# EAGLE board medium_h220x4 (EAGLE 5.06)
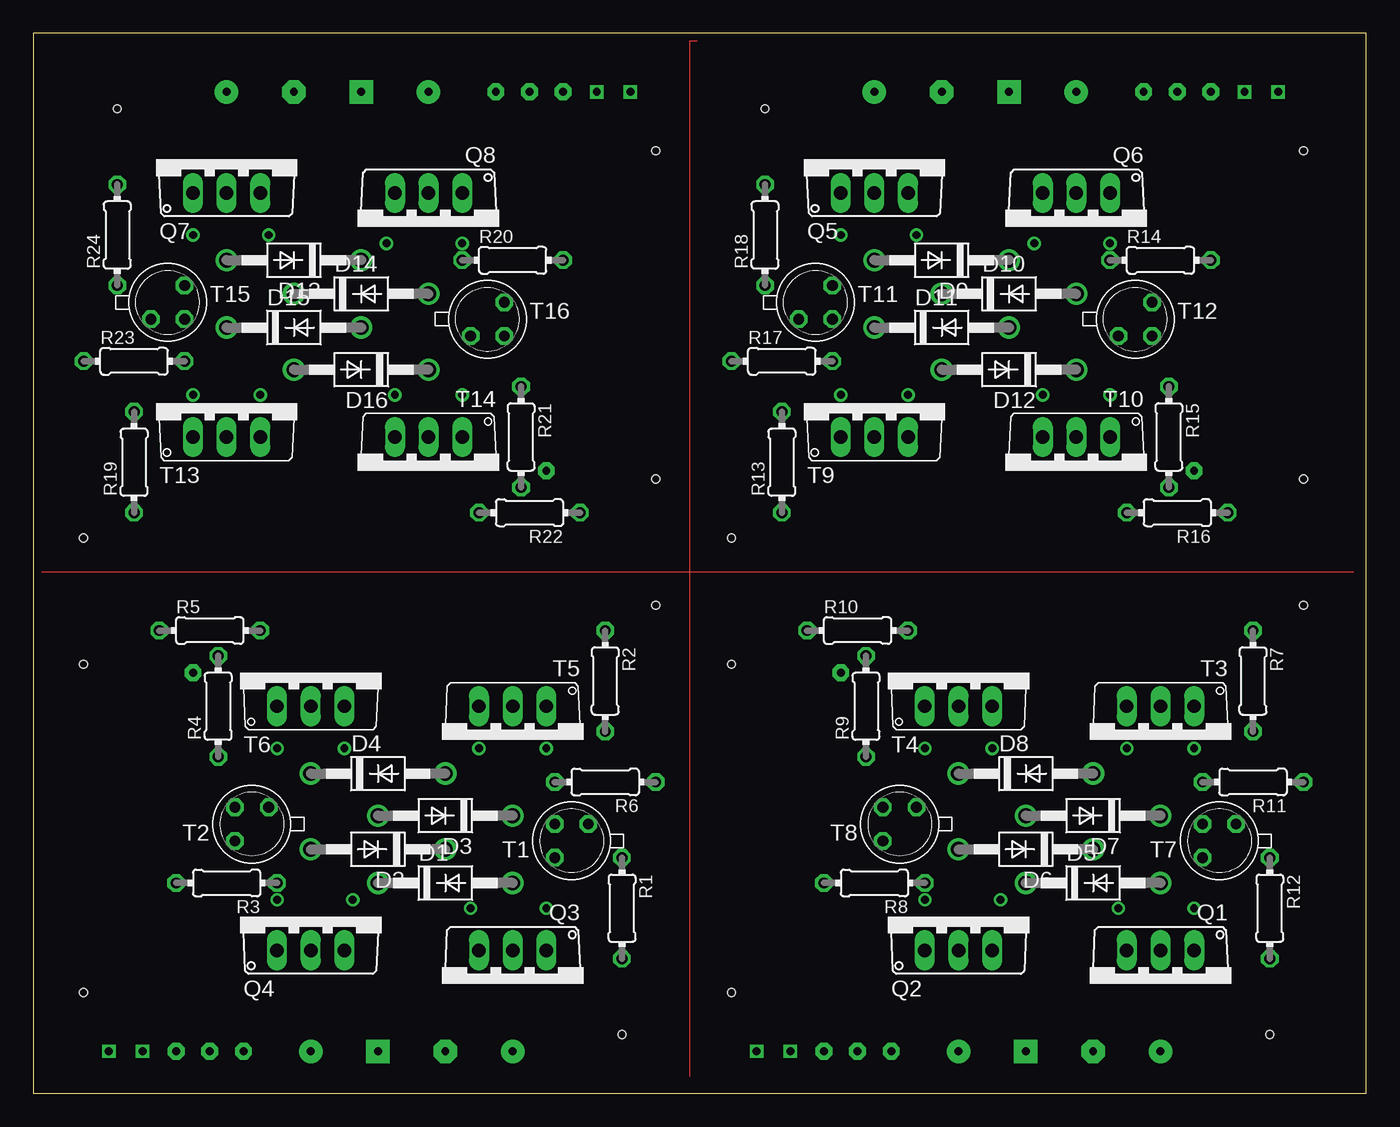
[diagram p0: board, top side]
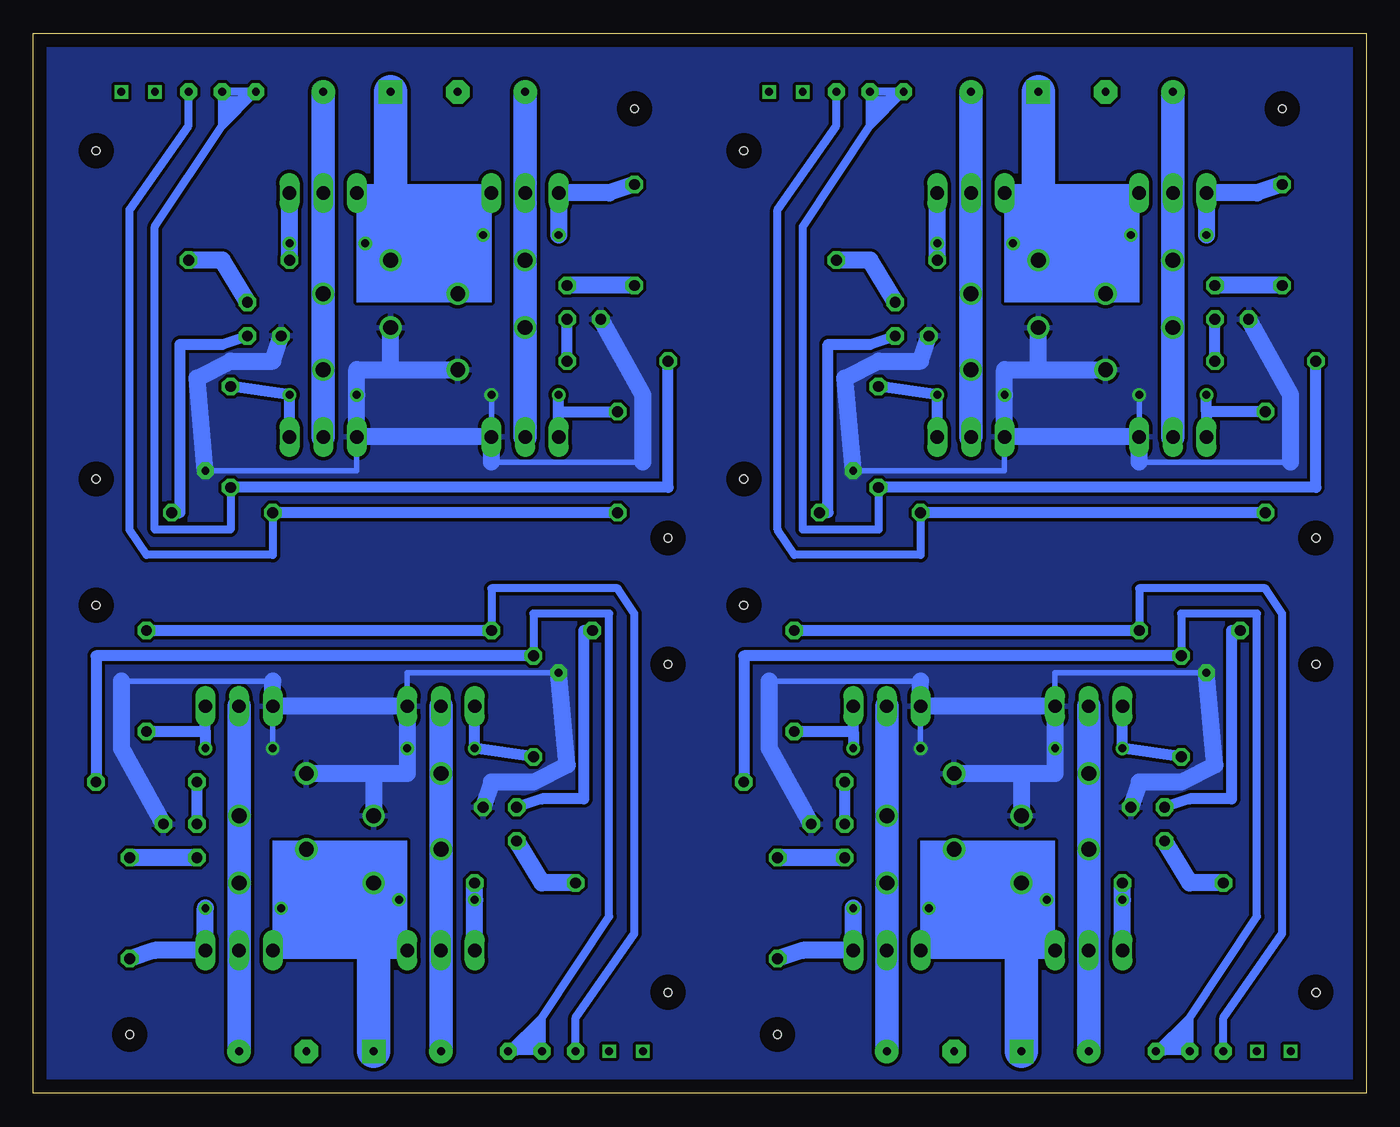
[diagram p1: board, bottom side, seen from below]

Size 100.64 x 80 mm. Coordinates in mm from the lower left corner, seen from the top.
Outline: 0,0 100.64,0 100.64,80 0,80 0,0
Copper layers (1*16): Top 0.035mm / dielectric 1.5mm / Bottom 0.035mm
Design rules "default *": minimum track width 10mil, minimum drill 24mil, track to track 10mil, track to pad 8mil, pad to pad 8mil, via to via 8mil, smd to smd 8mil, copper to edge 40mil, drill to drill 8mil, minimum pad ring 10mil, minimum via ring 8mil, stop-mask expansion 6mil, vias tented up to drill 0mil, thermal gap 10mil
Holes 0.6 mm at 3.81,7.62 44.45,4.45 3.81,32.38 46.99,36.83 52.7,7.62 93.34,4.45 52.7,32.38 95.89,36.83 95.89,71.12 55.24,74.3 95.89,46.35 52.7,41.91 46.99,71.12 6.35,74.3 46.99,46.35 3.81,41.91

## Footprints (pad centres in the part's own frame; a part is rotated, then mirrored left to right if it is on the bottom)
DO41-10 = drill 1.118 round: A 5.08,0; C -5.08,0
TO220AV = drill 1.016 long: B -2.54,-2.54; C 0,-2.54; E 2.54,-2.54
0204/7 = drill 0.813 octagon: 1 -3.81,0; 2 3.81,0
TO18 = drill 0.813 octagon: 1 -1.27,-1.27; 2 1.27,-1.27; 3 1.27,1.27
TO220V = drill 1.016 long: 1 -2.54,-2.54; 2 0,-2.54; 3 2.54,-2.54

## Placement (x,y rotation side)
D1  1N4004  [DO41-10]  31.12,15.88 0 top
D2  1N4004  [DO41-10]  26.04,18.41 180 top
D3  1N4004  [DO41-10]  31.12,20.95 180 top
D4  1N4004  [DO41-10]  26.04,24.13 0 top
D5  1N4004  [DO41-10]  80.01,15.88 0 top
D6  1N4004  [DO41-10]  74.93,18.41 180 top
D7  1N4004  [DO41-10]  80.01,20.95 180 top
D8  1N4004  [DO41-10]  74.93,24.13 0 top
D9  1N4004  [DO41-10]  68.58,62.87 180 top
D10  1N4004  [DO41-10]  73.66,60.33 0 top
D11  1N4004  [DO41-10]  68.58,57.78 0 top
D12  1N4004  [DO41-10]  73.66,54.61 180 top
D13  1N4004  [DO41-10]  19.69,62.87 180 top
D14  1N4004  [DO41-10]  24.77,60.33 0 top
D15  1N4004  [DO41-10]  19.69,57.78 0 top
D16  1N4004  [DO41-10]  24.77,54.61 180 top
Q1  MJE2955  [TO220AV]  85.09,8.26 180 top
Q2  MJE2955  [TO220AV]  69.85,13.34 0 top
Q3  MJE2955  [TO220AV]  36.2,8.26 180 top
Q4  MJE2955  [TO220AV]  20.96,13.34 0 top
Q5  MJE2955  [TO220AV]  63.5,70.48 0 top
Q6  MJE2955  [TO220AV]  78.74,65.41 180 top
Q7  MJE2955  [TO220AV]  14.61,70.48 0 top
Q8  MJE2955  [TO220AV]  29.85,65.41 180 top
R1  [0204/7]  44.45,13.97 270 top
R2  [0204/7]  43.18,31.11 270 top
R3  [0204/7]  14.61,15.88 180 top
R4  [0204/7]  13.97,29.21 90 top
R5  [0204/7]  13.33,34.92 0 top
R6  [0204/7]  43.18,23.5 180 top
R7  [0204/7]  92.08,31.11 270 top
R8  [0204/7]  63.5,15.88 180 top
R9  [0204/7]  62.86,29.21 90 top
R10  [0204/7]  62.23,34.92 0 top
R11  [0204/7]  92.08,23.5 180 top
R12  [0204/7]  93.34,13.97 270 top
R13  [0204/7]  56.52,47.62 90 top
R14  [0204/7]  85.09,62.87 0 top
R15  [0204/7]  85.73,49.53 270 top
R16  [0204/7]  86.36,43.81 180 top
R17  [0204/7]  56.52,55.24 0 top
R18  [0204/7]  55.24,64.77 90 top
R19  [0204/7]  7.62,47.62 90 top
R20  [0204/7]  36.2,62.87 0 top
R21  [0204/7]  36.83,49.53 270 top
R22  [0204/7]  37.46,43.81 180 top
R23  [0204/7]  7.62,55.24 0 top
R24  [0204/7]  6.35,64.77 90 top
T1  2N2222  [TO18]  40.64,19.05 180 top
T2  2N2222  [TO18]  16.51,20.32 180 top
T3  [TO220V]  85.09,26.67 180 top
T4  [TO220V]  69.85,31.75 0 top
T5  [TO220V]  36.2,26.67 180 top
T6  [TO220V]  20.96,31.75 0 top
T7  2N2222  [TO18]  89.54,19.05 180 top
T8  2N2222  [TO18]  65.41,20.32 180 top
T9  [TO220V]  63.5,52.07 0 top
T10  [TO220V]  78.74,46.99 180 top
T11  2N2222  [TO18]  59.05,59.69 0 top
T12  2N2222  [TO18]  83.19,58.42 0 top
T13  [TO220V]  14.61,52.07 0 top
T14  [TO220V]  29.85,46.99 180 top
T15  2N2222  [TO18]  10.16,59.69 0 top
T16  2N2222  [TO18]  34.29,58.42 0 top

## Library data of the parts
D1-D16 = diode
Q1-Q8 = transistor-power
R1-R24 = resistor
T1 T2 T7 T8 T11 T12 T15 T16 = transistor
T3-T6 T9 T10 T13 T14 = transistor-neu-to92

## Nets
+12V: D1.C D2.C Q3.E Q4.E
+12V1: D5.C D6.C Q1.E Q2.E
+12V2: D9.C D10.C Q5.E Q6.E
+12V3: D13.C D14.C Q7.E Q8.E
GND: D3.A D4.A D7.A D8.A D11.A D12.A D15.A D16.A T1.1 T2.1 T3.3 T4.3 T5.3 T6.3 T7.1 T8.1 T9.3 T10.3 T11.1 T12.1 T13.3 T14.3 T15.1 T16.1
N$1: R1.1 T1.3
N$2: Q3.B R1.2
N$3: D2.A D4.C Q4.C T6.2
N$4: R4.2 R6.1
N$7: R4.1 T6.1
N$8: Q4.B R3.1
N$9: R2.2 T5.1
N$10: R6.2 T1.2
N$11: R5.1 T2.2
N$12: R3.2 T2.3
N$13: D1.A D3.C Q3.C T5.2
N$15: R2.1 R5.2
N$17: R12.1 T7.3
N$22: Q1.B R12.2
N$23: R9.1 T4.1
N$24: Q2.B R8.1
N$25: R7.2 T3.1
N$26: R11.2 T7.2
N$27: R10.1 T8.2
N$28: R8.2 T8.3
N$29: R7.1 R10.2
N$30: D6.A D8.C Q2.C T4.2
N$31: D5.A D7.C Q1.C T3.2
N$33: R9.2 R11.1
N$41: R18.1 T11.3
N$42: Q5.B R18.2
N$43: R15.1 T10.1
N$44: Q6.B R14.1
N$45: R13.2 T9.1
N$46: R17.2 T11.2
N$47: R16.1 T12.2
N$48: R14.2 T12.3
N$49: R13.1 R16.2
N$50: D10.A D12.C Q6.C T10.2
N$51: D9.A D11.C Q5.C T9.2
N$53: R15.2 R17.1
N$61: R24.1 T15.3
N$62: Q7.B R24.2
N$63: R21.1 T14.1
N$64: Q8.B R20.1
N$65: R19.2 T13.1
N$66: R23.2 T15.2
N$67: R22.1 T16.2
N$68: R20.2 T16.3
N$69: R19.1 R22.2
N$70: D14.A D16.C Q8.C T14.2
N$71: D13.A D15.C Q7.C T13.2
N$73: R21.2 R23.1

## Tracks (layer width: path | path; a pad name or v marks a point on that pad's centre or on a via)
+12V  (via drill 0.6 pad 1.78)
  Bottom 1.27: 27.31,10.79 Q3.E | Q4.E 26.04,10.79 27.31,10.79 | 27.31,10.79 D1.C D2.C
  Bottom 2.54: v26.04,3.17 26.04,10.79
+12V1  (via drill 0.6 pad 1.78)
  Bottom 1.27: 76.2,10.79 Q1.E | Q2.E 74.93,10.79 76.2,10.79 | 76.2,10.79 D5.C D6.C
  Bottom 2.54: v74.93,3.17 74.93,10.79
+12V2  (via drill 0.6 pad 1.78)
  Bottom 1.27: 72.39,67.94 Q5.E | Q6.E 73.66,67.94 72.39,67.94 | 72.39,67.94 D9.C D10.C
  Bottom 2.54: 73.66,67.94 v73.66,75.56
+12V3  (via drill 0.6 pad 1.78)
  Bottom 1.27: 23.5,67.94 Q7.E | Q8.E 24.77,67.94 23.5,67.94 | 23.5,67.94 D13.C D14.C
  Bottom 2.54: 24.77,67.94 v24.77,75.56
GND  (via drill 0.6, 0.6 pad 1.27)
  Bottom 0.406: 33.66,31.11 45.09,31.11 | v12.06,31.75 23.5,31.75 T6.3 | T5.3 v33.66,26.04 | 82.55,31.11 93.98,31.11 | v60.96,31.75 72.39,31.75 T4.3 | T3.3 v82.55,26.04 | 54.61,47.62 66.04,47.62 | v87.63,46.99 76.2,46.99 T10.3 | T9.3 v66.04,52.7 | 5.71,47.62 17.15,47.62 | v38.73,46.99 27.31,46.99 T14.3 | T13.3 v17.15,52.7
  Bottom 1.27: 45.09,31.11 45.09,26.04 T1.1 | T2.1 17.15,23.5 13.97,23.5 11.43,24.77 v12.06,31.75 | 33.66,31.11 T5.3 T6.3 v23.5,26.04 23.5,24.13 26.04,24.13 | 26.04,24.13 D4.A | 26.04,24.13 D3.A | 93.98,31.11 93.98,26.04 T7.1 | T8.1 66.04,23.5 62.86,23.5 60.32,24.77 v60.96,31.75 | 82.55,31.11 T3.3 T4.3 v72.39,26.04 72.39,24.13 74.93,24.13 | 74.93,24.13 D8.A | 74.93,24.13 D7.A | 54.61,47.62 54.61,52.7 T11.1 | T12.1 82.55,55.24 85.73,55.24 88.27,53.98 v87.63,46.99 | 66.04,47.62 T9.3 T10.3 v76.2,52.7 76.2,54.61 73.66,54.61 | 73.66,54.61 D12.A | 73.66,54.61 D11.A | 5.71,47.62 5.71,52.7 T15.1 | T16.1 33.66,55.24 36.83,55.24 39.37,53.98 v38.73,46.99 | 17.15,47.62 T13.3 T14.3 v27.31,52.7 27.31,54.61 24.77,54.61 | 24.77,54.61 D16.A | 24.77,54.61 D15.A
  pour Bottom: 0,80.01 100.33,80.01 100.33,0 0,0
N$1
  Bottom 1.27: T1.3 R1.1
N$2
  Bottom 1.27: 38.73,13.97 Q3.B 42.54,10.79 R1.2
N$3  (via drill 0.6 pad 1.78)
  Bottom 1.778: D2.A Q4.C v20.96,3.17 | D2.A T6.2 | D2.A D4.C
N$4  (via drill 0.6 pad 1.27)
  Bottom 0.61: 13.33,5.71 v15.88,3.17 15.24,3.17 | 13.33,5.71 8.26,13.34 8.26,36.2 13.97,36.2 R4.2 | 15.24,3.17 v13.33,3.17 13.33,3.81 | 13.33,3.81 13.33,5.08 | 13.33,5.08 13.97,4.45 | 13.97,4.45 14.61,3.81 | 15.24,3.17 14.61,3.81 | 14.61,3.81 13.97,3.81 13.97,4.45 | 13.33,3.81 13.97,4.45 | 13.33,5.08 13.33,5.71
  Bottom 0.813: R6.1 46.99,33.02 R4.2
  other vias: 13.97,33.02
N$5  (via drill 0.6)
  other vias: 8.26,3.17
N$6  (via drill 0.6)
  other vias: 5.71,3.17
N$7
  Bottom 0.813: R4.1 18.42,26.04 T6.1
N$8  (via drill 0.6)
  Bottom 1.27: Q4.B v18.42,14.61 R3.1
N$9
  Bottom 0.813: 38.73,27.3 T5.1 | 38.73,27.3 38.73,26.04 | 38.73,27.3 R2.2
N$10
  Bottom 0.813: T1.2 R6.2
N$11
  Bottom 0.813: T2.2 13.33,22.23 10.16,22.23 10.16,34.92 R5.1
N$12
  Bottom 1.27: T2.3 13.33,15.88 R3.2
N$13  (via drill 0.6 pad 1.78)
  Bottom 1.778: T5.2 D3.C D1.A Q3.C v36.2,3.17
N$14  (via drill 0.6)
  other vias: 18.42,26.04
N$15  (via drill 0.6 pad 1.27)
  Bottom 0.61: R5.2 17.15,38.1 7.62,38.1 6.35,36.2 6.35,12.06 10.79,5.71 v10.79,3.17
  Bottom 0.813: R5.2 R2.1
  other vias: 17.15,34.92
N$16  (via drill 0.6 pad 1.78)
  other vias: 31.12,3.17
N$17
  Bottom 1.27: T7.3 R12.1
N$18  (via drill 0.6)
  other vias: 38.73,26.04
N$19  (via drill 0.6)
  other vias: 24.13,14.61
N$20  (via drill 0.6)
  other vias: 33.02,13.97
N$21  (via drill 0.6)
  other vias: 38.73,13.97
N$22
  Bottom 1.27: 87.63,13.97 Q1.B 91.44,10.79 R12.2
N$23
  Bottom 0.813: R9.1 67.31,26.04 T4.1
N$24  (via drill 0.6)
  Bottom 1.27: Q2.B v67.31,14.61 R8.1
N$25
  Bottom 0.813: 87.63,27.3 T3.1 | 87.63,27.3 87.63,26.04 | 87.63,27.3 R7.2
N$26
  Bottom 0.813: T7.2 R11.2
N$27
  Bottom 0.813: T8.2 62.23,22.23 59.05,22.23 59.05,34.92 R10.1
N$28
  Bottom 1.27: T8.3 62.23,15.88 R8.2
N$29  (via drill 0.6 pad 1.27)
  Bottom 0.61: R10.2 66.04,38.1 56.52,38.1 55.24,36.2 55.24,12.06 59.69,5.71 v59.69,3.17
  Bottom 0.813: R10.2 R7.1
  other vias: 66.04,34.92
N$30  (via drill 0.6 pad 1.78)
  Bottom 1.778: D6.A Q2.C v69.85,3.17 | D6.A T4.2 | D6.A D8.C
N$31  (via drill 0.6 pad 1.78)
  Bottom 1.778: T3.2 D7.C D5.A Q1.C v85.09,3.17
N$32  (via drill 0.6 pad 1.78)
  other vias: 80.01,3.17
N$33  (via drill 0.6 pad 1.27)
  Bottom 0.61: 62.23,5.71 v64.77,3.17 64.14,3.17 | 62.23,5.71 57.15,13.34 57.15,36.2 62.86,36.2 R9.2 | 64.14,3.17 v62.23,3.17 62.23,3.81 | 62.23,3.81 62.23,5.08 | 62.23,5.08 62.86,4.45 | 62.86,4.45 63.5,3.81 | 64.14,3.17 63.5,3.81 | 63.5,3.81 62.86,3.81 62.86,4.45 | 62.23,3.81 62.86,4.45 | 62.23,5.08 62.23,5.71
  Bottom 0.813: R11.1 95.89,33.02 R9.2
  other vias: 62.86,33.02
N$34  (via drill 0.6)
  other vias: 57.15,3.17
N$35  (via drill 0.6)
  other vias: 54.61,3.17
N$36  (via drill 0.6)
  other vias: 67.31,26.04
N$37  (via drill 0.6)
  other vias: 87.63,26.04
N$38  (via drill 0.6)
  other vias: 73.03,14.61
N$39  (via drill 0.6)
  other vias: 81.92,13.97
N$40  (via drill 0.6)
  other vias: 87.63,13.97
N$41
  Bottom 1.27: R18.1 T11.3
N$42
  Bottom 1.27: 60.96,64.77 Q5.B 57.15,67.94 R18.2
N$43
  Bottom 0.813: R15.1 81.28,52.7 T10.1
N$44  (via drill 0.6)
  Bottom 1.27: Q6.B v81.28,64.14 R14.1
N$45
  Bottom 0.813: T9.1 60.96,51.44 | 60.96,51.44 60.96,52.7 | 60.96,51.44 R13.2
N$46
  Bottom 0.813: R17.2 T11.2
N$47
  Bottom 0.813: T12.2 86.36,56.52 89.54,56.52 89.54,43.81 R16.1
N$48
  Bottom 1.27: T12.3 86.36,62.87 R14.2
N$49  (via drill 0.6 pad 1.27)
  Bottom 0.61: v82.55,43.81 82.55,40.64 92.08,40.64 93.34,42.55 93.34,66.67 88.9,73.03 v88.9,75.56
  Bottom 0.813: R13.1 v82.55,43.81
N$50  (via drill 0.6 pad 1.78)
  Bottom 1.778: D10.A Q6.C v78.74,75.56 | T10.2 D10.A | D10.A D12.C
N$51  (via drill 0.6 pad 1.78)
  Bottom 1.778: T9.2 D11.C D9.A Q5.C v63.5,75.56
N$52  (via drill 0.6 pad 1.78)
  other vias: 68.58,75.56
N$53  (via drill 0.6 pad 1.27)
  Bottom 0.61: 86.36,73.03 v83.82,75.56 84.45,75.56 | 86.36,73.03 91.44,65.41 91.44,42.55 85.73,42.55 R15.2 | 84.45,75.56 v86.36,75.56 86.36,74.93 | 86.36,73.66 86.36,74.93 | 86.36,73.66 85.73,74.3 | 85.73,74.3 85.09,74.93 | 84.45,75.56 85.09,74.93 | 85.09,74.93 85.73,74.93 85.73,74.3 | 86.36,74.93 85.73,74.3 | 86.36,73.03 86.36,73.66
  Bottom 0.813: R17.1 52.7,45.72 R15.2
  other vias: 85.73,45.72
N$54  (via drill 0.6)
  other vias: 91.44,75.56
N$55  (via drill 0.6)
  other vias: 93.98,75.56
N$56  (via drill 0.6)
  other vias: 81.28,52.7
N$57  (via drill 0.6)
  other vias: 60.96,52.7
N$58  (via drill 0.6)
  other vias: 75.57,64.14
N$59  (via drill 0.6)
  other vias: 66.68,64.77
N$60  (via drill 0.6)
  other vias: 60.96,64.77
N$61
  Bottom 1.27: R24.1 T15.3
N$62
  Bottom 1.27: 12.06,64.77 Q7.B 8.26,67.94 R24.2
N$63
  Bottom 0.813: R21.1 32.38,52.7 T14.1
N$64  (via drill 0.6)
  Bottom 1.27: Q8.B v32.38,64.14 R20.1
N$65
  Bottom 0.813: 12.06,51.44 T13.1 | 12.06,51.44 12.06,52.7 | R19.2 12.06,51.44
N$66
  Bottom 0.813: R23.2 T15.2
N$67
  Bottom 0.813: T16.2 37.46,56.52 40.64,56.52 40.64,43.81 R22.1
N$68
  Bottom 1.27: T16.3 37.46,62.87 R20.2
N$69  (via drill 0.6 pad 1.27)
  Bottom 0.61: R22.2 33.66,40.64 43.18,40.64 44.45,42.55 44.45,66.67 40,73.03 v40,75.56
  Bottom 0.813: R19.1 R22.2
  other vias: 33.66,43.81
N$70  (via drill 0.6 pad 1.78)
  Bottom 1.778: D14.A Q8.C v29.85,75.56 | T14.2 D14.A | D14.A D16.C
N$71  (via drill 0.6 pad 1.78)
  Bottom 1.778: T13.2 D15.C D13.A Q7.C v14.61,75.56
N$72  (via drill 0.6 pad 1.78)
  other vias: 19.69,75.56
N$73  (via drill 0.6 pad 1.27)
  Bottom 0.61: 37.46,73.03 v34.92,75.56 35.56,75.56 | 37.46,73.03 42.54,65.41 42.54,42.55 36.83,42.55 R21.2 | 35.56,75.56 v37.46,75.56 37.46,74.93 | 37.46,73.66 37.46,74.93 | 37.46,73.66 36.83,74.3 | 36.83,74.3 36.2,74.93 | 35.56,75.56 36.2,74.93 | 36.2,74.93 36.83,74.93 36.83,74.3 | 37.46,74.93 36.83,74.3 | 37.46,73.03 37.46,73.66
  Bottom 0.813: R23.1 3.81,45.72 R21.2
  other vias: 36.83,45.72
N$74  (via drill 0.6)
  other vias: 42.54,75.56
N$75  (via drill 0.6)
  other vias: 45.09,75.56
N$76  (via drill 0.6)
  other vias: 32.38,52.7
N$77  (via drill 0.6)
  other vias: 12.06,52.7
N$78  (via drill 0.6)
  other vias: 26.67,64.14
N$79  (via drill 0.6)
  other vias: 17.78,64.77
N$80  (via drill 0.6)
  other vias: 12.06,64.77
S$1
  Top 0: 0.64,39.37 99.7,39.37
S$2
  Top 0: 50.16,79.38 49.53,79.38 49.53,1.27
(copper drawn outside any net)
  shapes: Bottom area x4